# Altium PCB Raumluftsensor.PcbDoc
Units mil, origin at the board's own origin, x right, y up, seen from the top; angles counter-clockwise.
Board outline 1008 x 1735 mil, 2 copper layers (Top Layer, Bottom Layer); 3 components, 5 nets, 27 pads, 0 vias.
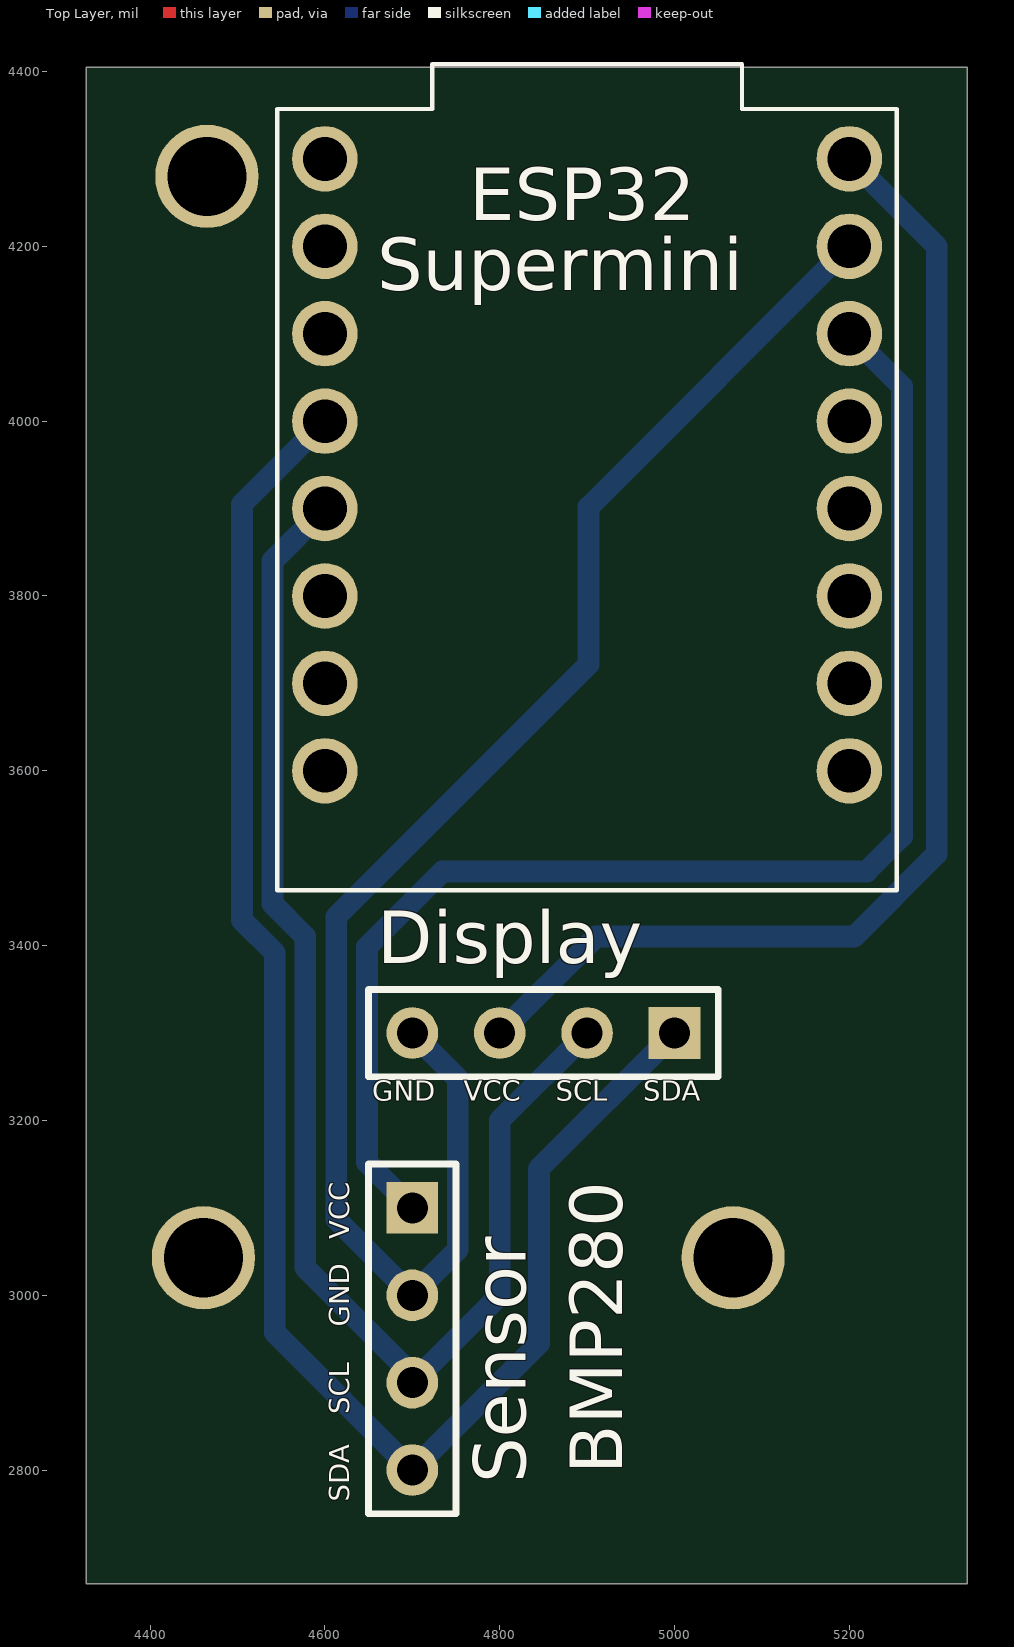
[diagram p0: Top Layer view]
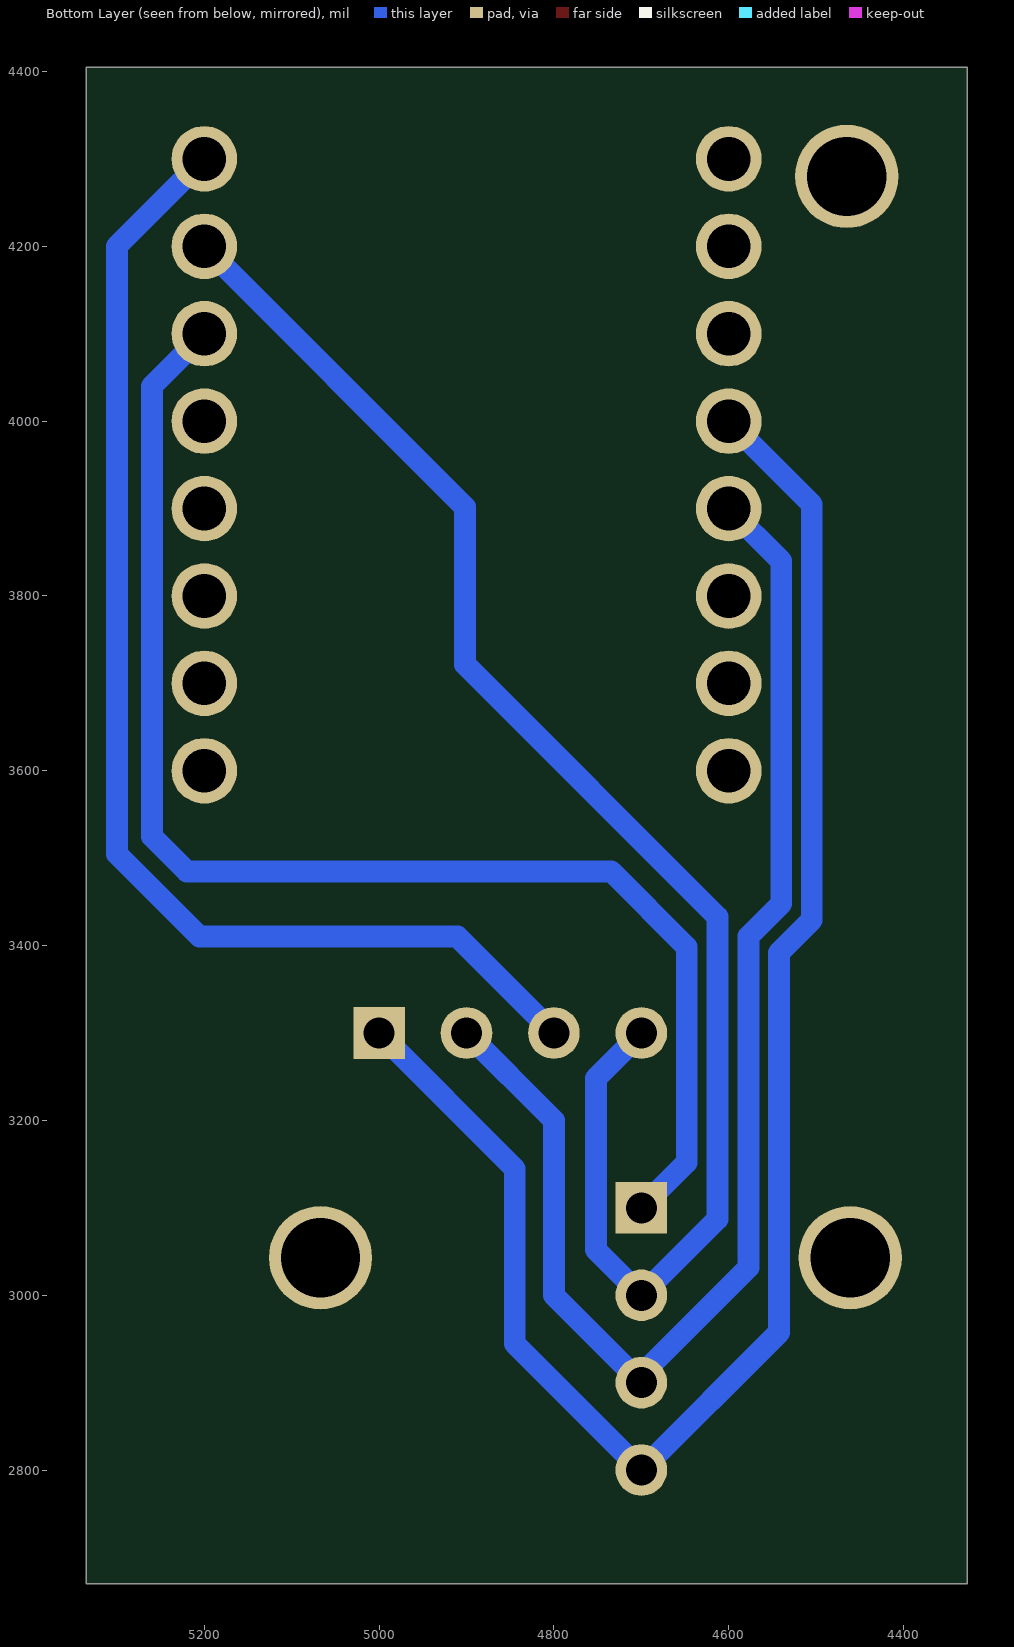
[diagram p1: Bottom Layer view, seen from below]

## Layer stack, top to bottom
Top Solder: solder mask 0.4, Solder Resist, Dk 3.5
Top Layer: signal copper 1.4
Dielectric1: dielectric 12.6, FR-4, Dk 4.8
Bottom Layer: signal copper 1.4
Bottom Solder: solder mask 0.4, Solder Resist, Dk 3.5

## Board outline
4327,2670 4327,4405 5335,4405 5335,2670

## Design rules (kind name [scope] priority, off if disabled: settings)
Clearance "Text (Polygon)" [inPolygon vs isText] p1: gap=0 ignorepadtopadclearanceinfootprint=FALSE
Clearance "Masseflaeche (Polygon)" [All vs inPolygon] p2: gap=20 ignorepadtopadclearanceinfootprint=FALSE except(0: Arc-Hole Track-Hole SMDPad-Hole THPad-Hole Via-Hole Fill-Hole Poly-Hole Region-Hole Text-Hole)
Clearance "Abstand (Clearance)" [All] p3: gap=10 ignorepadtopadclearanceinfootprint=FALSE except(0: Arc-Hole Track-Hole SMDPad-Hole THPad-Hole Via-Hole Fill-Hole Poly-Hole Region-Hole Text-Hole)
DiffPairsRouting [All] p1: maxlimit=15 minlimit=12 mostfreqgap=12 toplayer_minwidth=15 toplayer_maxwidth=15 toplayer_prefwidth=15 bottomlayer_minwidth=15 bottomlayer_maxwidth=15 bottomlayer_prefwidth=15 maxuncoupledlength=500
FabricationTestPointUsage TestPointUsage [All] p1: valid=0 allowmultiple=FALSE
FabricationTestpoint Testpoint [All] p1: side=3 testpointundercomponent=TRUE minsize=40 maxsize=100 preferedsize=60 minholesize=0 maxholesize=40 preferedholesize=32 testpointgrid=1 allowsidetop=TRUE allowsidebottom=TRUE usegrid=TRUE gridtolerance=0.01
HoleSize [All] p1: absolutevalues=TRUE maxlimit=100 minlimit=28 maxpercent=80.000 minpercent=20.000
HoleToHoleClearance [All] p1: gap=10 allowstackedmicrovias=FALSE
PlaneConnect [All] p1: planeconnectstyle=Relief reliefexpansion=20 reliefentries=4 reliefconductorwidth=32 reliefairgap=10
PolygonConnect [All] p1: connectstyle=Relief reliefconductorwidth=32 reliefentries=4 polygonreliefangle="90 Angle" airgapwidth=10
RoomDefinition Raumluftsensor [InComponentClass('Raumluftsensor')] p1: confinementstyle=ConfineIn formatcopy=TRUE lockcomponents=FALSE outline 2500,2100 8600,2100 8600,6200 2500,6200
RoutingVias [All] p1: holewidth=28 width=50 viastyle="Through Hole" minholewidth=28 minwidth=50 maxholewidth=28 maxwidth=50
SMDEntry [All] p1: side=TRUE corner=TRUE anyangle=FALSE
SilkToSilkClearance [All] p1 off: silktosilkclearance=10
SilkToSolderMaskClearance SilkscreenOverComponentPads [IsPad] p1 off: minsilkscreentomaskgap=10 clearancetoexposedcopper=TRUE
SolderMaskExpansion [All] p1: expansion=4 istentingtop=FALSE
UnRoutedNet [All] p1: checkbadconnections=TRUE
Width [All] p1: maxlimit=200 minlimit=11 preferedwidth=25 minimp=50.000000 maximp=50.000000 favimp=50.000000
21 further rules are at their usual default settings.

## Components (designator, comment, footprint, x,y, rotation, side; value= is the part's Value field where it differs from the comment)
Display "Header 4" HDR1X4 5000,3300 r180 top (schematic designator Display-SH1106)
ESP32 "ESP32-C3_SUPERMINI" MODULE_ESP32-C3_SUPERMINI 4900,3910.24 r0 top
Sensor "Header 4" HDR1X4 4700,3100 r270 top (schematic designator Sensor-BMP280)

## Footprints (in the part's own frame and the unit in brackets; to place one, negate y for a bottom-side part, rotate by r counter-clockwise, add the part's x,y. Pads: shape width x height; smd on the part's side, far side on the other; paste and mask are expansions set on the pad)
HDR1X4 [mm] "Connector; Header; 4 Position"
  rect 1.5x1.5 hole 0.9: 1(0,0)
  round 1.5 hole 0.9: 2(2.54,0) 3(5.08,0) 4(7.62,0)
  silkscreen extent -1.27,-1.27 8.89,1.27
MODULE_ESP32-C3_SUPERMINI [mm]
  round 1.905 hole 1.27: 0(7.62,-7.88) 1(7.62,-5.34) 2(7.62,-2.8) 3(7.62,-0.26) 3.3(7.62,4.82) 4(7.62,2.28) 5(-7.62,9.9) 5V(7.62,9.9) 6(-7.62,7.36) 7(-7.62,4.82) 8(-7.62,2.28) 9(-7.62,-0.26) 10(-7.62,-2.8) 20(-7.62,-5.34) 21(-7.62,-7.88) G(7.62,7.36)
  silkscreen extent -9,-11.35 9,12.65, body extent -9,-11.35 9,12.65, height 4.16

## Part data
Display Sensor: "Header, 4-Pin", LatestRevisionDate=17-Jul-2002, LatestRevisionNote="Re-released for DXP Platform.", Publisher="Altium Limited"
ESP32: library part ESP32-C3_SUPERMINI_TH, "Super tiny ESP32-C3 board", Package=Package, Check_prices=https://www.snapeda.com/parts/ESP32-C3%20SuperMini_TH/Espressif+Systems/view-part/?ref=eda, MF="Espressif Systems", MP="ESP32-C3 SuperMini_TH", SnapEDA_Link=https://www.snapeda.com/parts/ESP32-C3%20SuperMini_TH/Espressif+Systems/view-part/?ref=snap

## Free pads (board coordinates)
  round 118.11 hole 90.55: 2(4461,3043) 2(4465,4280) 2(5067,3043)

## Nets (pads, with @x,y where several pads share a name; then routed paths per layer and width w, separated by ;. In a path a pad name is that pad's centre, name@x,y a point inside that pad or via, vN(x,y) a via of type N, cw(c..) or ccw(c..) an arc to the next point about the centre after c; other vN are vias at no path point)
NetDisplay-SH1106_1: Display.1 ESP32.8 Sensor.4 | length 1944.4
  Bottom Layer w25: ESP32.8 4505,3905 4505,3429.36 4542.56,3391.8 4542.56,2957.44 Sensor.4 4844.74,2944.74 4844.74,3144.74 Display.1
NetDisplay-SH1106_2: Display.2 ESP32.9 Sensor.3 | length 1574
  Bottom Layer w25: ESP32.9 4540,3840 4540,3447.84 4577.56,3410.29 4577.56,3031.66 4700,2909.22 Sensor.3 4800,3000 4800,3200 Display.2
NetDisplay-SH1106_3: Display.3 ESP32.5V | length 1421.4
  Bottom Layer w25: Display.3 4910.29,3410.29 5205.36,3410.29 5300,3504.93 5300,4200 ESP32.5V
NetDisplay-SH1106_4: Display.4 ESP32.G Sensor.2 | length 1822.3
  Bottom Layer w25: Display.4 4752.03,3247.97 4752.03,3052.03 Sensor.2 4612.97,3087.03 4612.97,3432.97 4901.7,3721.7 4901.7,3901.7 ESP32.G
NetESP32_3.3: ESP32.3.3 Sensor.1 | length 1584.2
  Bottom Layer w25: Sensor.1 4647.97,3152.03 4647.97,3398.26 4734.64,3484.93 5220,3484.93 5260,3524.93 5260,4040 ESP32.3.3
pads on no net: ESP32.0 ESP32.1 ESP32.2 ESP32.3 ESP32.4 ESP32.5 ESP32.6 ESP32.7 ESP32.10 ESP32.20 ESP32.21

## Other copper
Top Layer:
  text "LAYOUT TOP" at 10300,880 h70
  text "2" at 10300,280 h70
Bottom Layer:
  text "LAYOUT BOTTOM" at 10300,880 h70
  text "3" at 10300,280 h70

## Silkscreen, mask and mechanical layers (free items; w line width, h text height)
Top Overlay:
  text "Supermini" at 4660,4149.99 h60
  text "GND" at 4653.94,3214.37 h39.37
  text "VCC" at 4758.97,3214.37 h39.37
  text "SCL" at 4863.94,3214.37 h39.37
  text "SDA" at 4963.94,3214.37 h39.37
  text "VCC" at 4635.63,3063.97 h39.37 r90
  text "GND" at 4635.63,2963.94 h39.37 r90
  text "SCL" at 4635.63,2863.94 h39.37 r90
  text "BMP280" at 4940,2795.05 h60 r90
  text "SDA" at 4635.63,2763.94 h39.37 r90
  text "BESTUECK. TOP" at 10300,880 h70
  text "4" at 10300,280 h70
Bottom Overlay:
  text "BESTUECK. BOTTOM" at 10300,880 h70
  text "5" at 10300,280 h70
Mechanical 4 (Printumriss):
  lines w10: 4327,2670 4327,2711.26 4327,2751.26 4327,4280 4327,4405 5335,4405 5335,4300 5335,2670 5325,2670 4700,2670 4327,2670
Mechanical 15:
  lines w10: 4461,3043 4467,3043
Mechanical 16 (Blatt-Beschriftung):
  drawing of 350 lines, arcs and shapes, not listed
  text "1" at 1427,7465 h70
  text "2" at 4287,7465 h70
  text "3" at 7167,7465 h70
  text "4" at 10037,7465 h70
  text "A" at 75,6559 h70
  text "A" at 11375,6559 h70
  text "B" at 75,4667 h70
  text "B" at 11375,4667 h70
  text "C" at 75,2757 h70
  text "C" at 11375,2757 h70
  text "TITEL:" at 6850,1300 h45
  text "PROJEKTNAME" at 6900,1180 h70
  text "NAME:" at 6850,1000 h45
  text "GRUPPE:" at 8350,1000 h45
  text "KLASSE:" at 9180,1000 h45
  text "DOKUMENTENART:" at 10250,1000 h45
  text "MAX MUSTERMANN" at 6900,880 h70
  text "I" at 8400,880 h70
  text "KLASSE" at 9230,880 h70
  text "D" at 75,867 h70
  text "D" at 11375,867 h70
  text "DATUM:" at 6850,700 h45
  text "REVISION:" at 8350,700 h45
  text "MASZSTAB:" at 9180,700 h45
  text "DOKUMENTENSTATUS:" at 10250,700 h45
  text "HTBLVA" at 5550,600 h70
  text ".PRINT_DATE" at 6900,580 h70
  text "0.1" at 8400,580 h70
  text ".Print_Scale" at 9230,580 h70
  text "ENTWURF" at 10300,580 h70
  text "Abt. Elektronik" at 5550,500 h70
  text "Anichstrasse 26-28" at 5550,400 h70
  text "SACHNUMMER/DATEINAME:" at 6850,400 h45
  text "BLATT:" at 10250,400 h45
  text "BLAETTER:" at 10800,400 h45
  text "A-6020 Innsbruck" at 5550,300 h70
  text ".PCB_FILE_NAME_NO_PATH" at 6900,280 h70
  text "6" at 10850,280 h70
  text "1" at 1427,65 h70
  text "2" at 4287,65 h70
  text "3" at 7167,65 h70
  text "4" at 10037,65 h70
Drill Drawing:
  text "BOHRPLAN" at 10300,880 h70
  text "6" at 10300,280 h70

## Dimensions
4465,4280 to 4461,3043 on Mechanical 3 (Bemassungen)
4461,3043 to 5067,3043 on Mechanical 3 (Bemassungen)